# Altium PCB PAYL0006_PC_Overview_Block.PcbDoc (part 2 of 2)
Units mm, origin at the board's own origin, x right, y up, seen from the top; angles counter-clockwise.
Board outline 116.4 x 100.9 mm, 6 copper layers (Top Layer, MidLayer1, VSUP1_PLANE, GND_PLANE, VSUP3_PLANE, Bottom Layer); 172 components, 183 nets, 811 pads, 237 vias.
Unrouted connection lines stored in the file: 35.
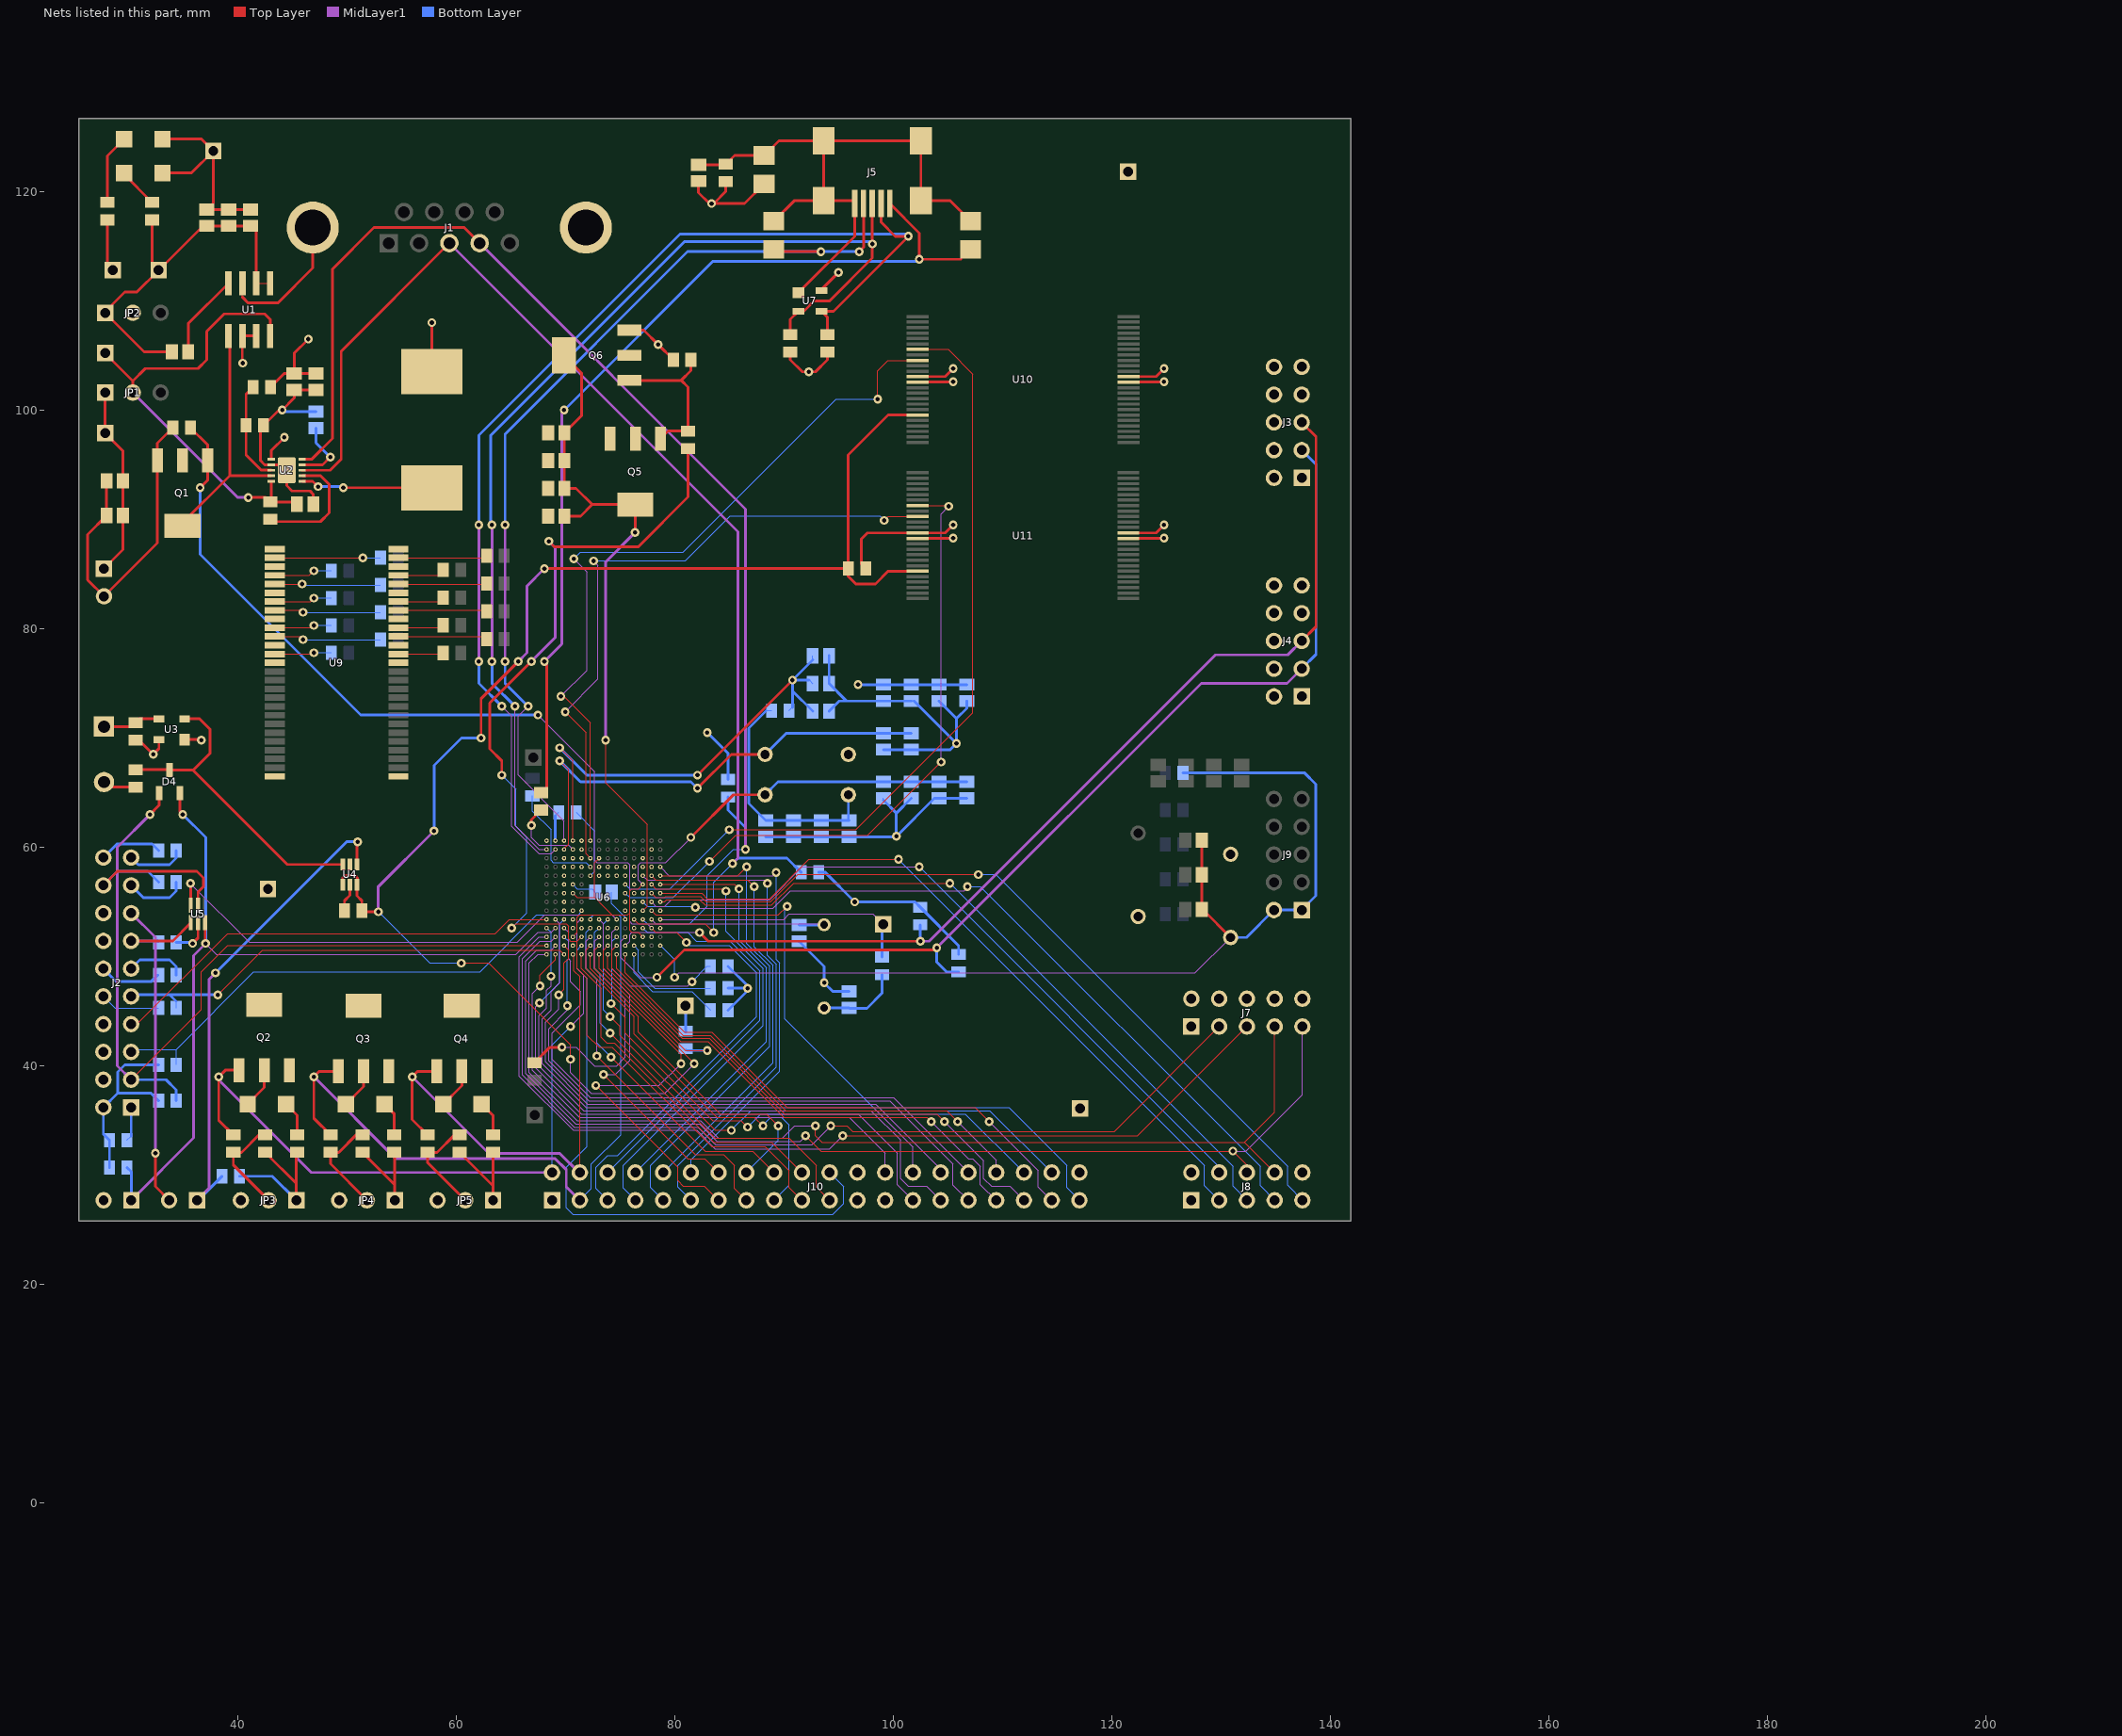
[diagram p6: the nets of this part, all layers, seen from the top]

## Via types
v1: diameter 0.8, hole 0.4, Top Layer to Bottom Layer, 235 vias
v2: diameter 1.5, hole 1, Top Layer to Bottom Layer, 2 vias

## Nets (pads, with @x,y where several pads share a name; then routed paths per layer and width w, separated by ;. In a path a pad name is that pad's centre, name@x,y a point inside that pad or via, vN(x,y) a via of type N, cw(c..) or ccw(c..) an arc to the next point about the centre after c; other vN are vias at no path point) (continued)
GND: C1.2 C2.1 C3.2 C4.1 C5.2 C6.2 C7.2 C8.2 C9.2 C10.2 C11.1 C12.1 C27.1 C29.2 C30.2 C31.2 C32.2 C33.2 C34.2 C35.2 C36.2 C37.2 C38.2 C39.2 C40.2 C41.2 C42.2 C43.2 C44.2 C45.2 C46.2 C47.2 C48.2 C49.2 D2.2 D3.2 D11.1 FB5.1 J1.10 J1.11 J2.4 J2.6 J2.8 J2.10 J2.12 J2.14 J2.16 J2.18 J2.20 J3.4 J3.6 J3.7 J3.8 J3.9 J3.10 J4.4 J4.6 J4.7 J4.8 J4.9 J4.10 J7.4 J7.6 J7.8 J7.10 J8.10 J10.23 J10.24 J10.25 J10.40 JP3.3 JP4.3 JP5.3 JP6.2 PJ1.2 Q1.3 Q2.3 Q3.3 Q4.3 R2.1 R4.1 R12.1 R13.1 R14.1 R15.1 R18.1 R34.1 R35.1 R36.1 R37.1 R111.1 R112.1 R113.1 S1.2 TP1.1 TP2.1 TP3.1 TP4.1 U1.3 U1.6 U1.7 U2.2 U2.11 U3.1 U4.2 U5.2 U6.A11 U6.B4 U6.B12 U6.C3 U6.C4 U6.C7 U6.D4 U6.D6 U6.D8 U6.D9 U6.D12 U6.E4 U6.E9 U6.F4 U6.G4 U6.G11 U6.H4 U6.K3 U6.K4 U6.L3 U6.L6 U6.L9 U6.L11 U6.L13 U6.M3 U6.M4 U6.M6 U6.M8 U6.N1 U9.6 U9.12 U9.28 U9.41 U9.46 U9.52 U9.54 U10.13 U10.36 U11.13 U11.36 | length 235
  Top Layer w0.1: v1@36.65,69.85 v1(36.7,69.8) ; v1@40.454,104.346 v1(40.5,104.3) ; 40.454,110.346 U1.3@40.454,111.587 ; v1@43.797,100 v1(44.1,100) ; U2.11@44.018,94.993 U2.11@44.518,94.493 ; v1@83.2,118.9 v1(83.4,118.9) ; v1@105.466,88.266 v1(105.5,88.3) ; v1@105.466,102.566 v1(105.5,102.6) ; v1@124.766,88.266 v1(124.8,88.3) ; v1@124.766,102.566 v1(124.8,102.6)
  Top Layer w0.25: J2.18@27.74,56.516 29.024,57.8 36.3,57.8 36.9,57.2 36.9,56.4 36.4,55.9 U5.2@36.4,54.7 ; S1.2@27.8,65.96 28.26,65.5 R18.1@30.7,65.5 ; C2.1@28.036,93.529 C1.2@28.036,90.354 26.3,88.618 26.3,84.46 PJ1.2@27.8,82.96 32.682,87.842 Q1.3@32.682,95.406 32.682,96.982 R2.1@34.1,98.4 ; D2.2@33.15,121.7 35.8,121.7 TP4.1@37.8,123.7 ; D3.2@33.15,124.8 36.7,124.8 TP4.1@37.8,123.7 ; U3.1@35.175,69.85 v1@36.65,69.85 ; v1@40.454,104.346 U1.6@40.454,106.787 U1.7@41.724,106.787 ; 40.454,110.346 41,109.8 43.7,109.8 46.905,113.005 J1.10@46.905,116.7 ; C9.2@41.2,118.35 C8.2@39.2,118.35 C7.2@37.2,118.35 37.8,118.95 TP4.1@37.8,123.7 ; U2.2@43.1,95 42.5,95 42.1,95.4 42.1,98.303 v1@43.797,100 ; U2.2@43.106,94.993 U2.11@44.018,94.993 ; v1(44.1,100) 45.2,101.1 C5.2@45.2,101.85 C6.2@47.2,101.85 ; U2.11@44.518,94.493 44.518,93.082 45,92.6 46.65,92.6 46.95,92.3 C4.1@46.95,91.4 ; C12.1@82.2,120.95 82.2,119.9 v1@83.2,118.9 ; v1(83.4,118.9) v1@83.6,118.9 ; R37.1@84.7,120.9 84.7,120 v1@83.6,118.9 ; D11.1@88.2,120.7 86.4,118.9 v1@83.6,118.9 ; R35.1@90.6,105.3 90.6,104.6 91.7,103.5 v1(92.3,103.5) 92.9,103.5 94,104.6 R34.1@94,105.3 ; U11.13@102.244,88.266 v1@105.466,88.266 ; U10.13@102.244,102.566 v1@105.466,102.566 ; U11.36@121.544,88.266 v1@124.766,88.266 ; U10.36@121.544,102.566 v1@124.766,102.566
  Bottom Layer w0.1: J2.10@27.74,46.356 28.796,45.3 R12.1@32.8,45.3 ; R13.1@32.7,48.3 R13.1@32.8,48.3 ; v1(44.1,100) v1@44.25,99.85 ; R36.1@69.1,62.9 R36.1@69.4,63.2 ; U6.L6@70.7,56.6 71.1,56.2 72.45,56.2 C27.1@72.75,55.9 ; v1@86.7,46.9 v1(86.7,47.1) v1@86.7,47.3 ; C11.1@91.414,51.386 C11.1@91.414,51.398 ; 95.7,73.378 95.7,73.43 ; C10.2@95.986,46.802 C10.2@95.986,46.814 ; C40.2@99.121,64.306 C40.2@99.121,64.488 ; v1@100.253,60.953 v1(100.3,61) ; C35.2@101.661,73.378 C35.2@101.922,73.378
  Bottom Layer w0.25: J2.12@27.74,48.896 28.936,47.7 32.1,47.7 R13.1@32.7,48.3 ; J2.18@27.74,56.516 29.024,57.8 31.8,57.8 R14.1@32.8,56.8 ; J2.20@27.74,59.056 28.984,60.3 32.2,60.3 R15.1@32.8,59.7 ; v1@44.25,99.85 C3.2@47.2,99.85 ; U6.N1@69.1,60.6 R36.1@69.1,62.9 ; R111.1@84.9,45.1 v1@86.7,46.9 ; R112.1@84.9,47.1 v1(86.7,47.1) ; R113.1@84.9,49.1 v1@86.7,47.3 ; C32.2@88.348,60.953 C31.2@90.888,60.953 C30.2@93.428,60.953 C29.2@95.968,60.953 v1@100.253,60.953 ; C11.1@91.414,51.386 93.7,49.1 v1(93.7,47.6) 94.486,46.814 C10.2@95.986,46.814 ; C47.2@94.147,72.443 95.082,73.378 95.7,73.378 C36.2@99.121,73.378 C35.2@101.661,73.378 ; C45.2@94.147,77.523 C46.2@94.147,74.983 95.7,73.43 ; C40.2@99.121,64.306 100.3,63.127 ; C48.2@99.121,68.933 C49.2@101.661,68.933 105.233,68.933 v1(105.8,69.5) ; C39.2@101.661,64.488 100.3,63.127 ; C35.2@101.922,73.378 v1(105.8,69.5) ; C34.2@104.201,73.378 105.8,71.779 ; C37.2@106.741,64.488 C38.2@104.201,64.488 103.788,64.488 v1(100.3,61) 100.3,63.127 ; C33.2@106.741,73.378 106.741,72.72 105.8,71.779 ; v1(105.8,69.5) 105.8,71.779
GPIO0: J10.2 Q2.1 R20.1 U6.K10 | length 67.1
  Top Layer w0.25: R20.1@39.634,33.682 38.3,35.016 v1(38.3,39) 38.901,39.601 Q2.1@40.163,39.601
  MidLayer1 w0.1: v1(70.5,43.6) 71.7,44.8 71.7,48.3 71.1,48.9 71.1,53.1 71.4,53.4 U6.K10@71.5,53.4
  MidLayer1 w0.25: v1(38.3,39) 38.3,38.7 46.76,30.24 J10.2@68.8,30.24
  Bottom Layer w0.1: J10.2@68.8,30.24 68.8,41.9 v1(70.5,43.6)
GPIO1: J10.3 Q3.1 R21.1 U6.J10 | length 68.9
  Top Layer w0.25: R21.1@48.524,33.682 47,35.206 v1(47,39) 47.501,39.501 Q3.1@49.253,39.501
  MidLayer1 w0.25: v1(47,39) 54.5,31.5 69.1,31.5 70.1,30.5 70.1,28.94 J10.3@71.34,27.7
  Bottom Layer w0.1: J10.3@71.34,27.7 72.4,28.76 72.4,31 75.1,33.7 75.1,53.6 74.9,53.8 72.6,53.8 72.3,53.5 U6.J10@72.3,53.4
GPIO2: J10.4 Q4.1 R22.1 U6.L14 | length 47.5
  Top Layer w0.1: U6.L14@70.7,50.2 70.8,50.1 70.8,48.7 71.34,48.16 J10.4@71.34,30.24
  Top Layer w0.25: R22.1@57.414,33.682 56,35.096 v1(56,39) 56.501,39.501 Q4.1@58.243,39.501
  MidLayer1 w0.1: J10.4@71.26,30.24 J10.4@71.34,30.24
  MidLayer1 w0.25: v1(56,39) 63,32 69.5,32 J10.4@71.26,30.24
GPIO3: J10.5 Q1.1 R2.2 U6.B11 | length 115
  Top Layer w0.1: U6.B11@77.9,52.6 78.3,52.2 80.2,52.2 v1(81.1,51.3)
  Top Layer w0.25: R2.2@35.7,98.4 37.282,96.818 Q1.1@37.282,95.406 37.282,93.582 v1(36.6,92.9)
  MidLayer1 w0.1: v1(67.5,72.1) 72.7,66.9 72.7,58.8 72.9,58.6 75.7,58.6 75.9,58.4 75.9,53.2 76.1,53 77.5,53 U6.B11@77.9,52.6
  Bottom Layer w0.1: J10.5@73.88,27.7 72.8,28.78 72.8,30.7 73.9,31.8 74.8,31.8 87.5,44.5 87.5,48.5 85,51 81.4,51 v1(81.1,51.3)
  Bottom Layer w0.25: v1(36.6,92.9) 36.6,86.8 51.3,72.1 v1(67.5,72.1)
GPIO4: J10.6 U6.C11 | length 36.5
  Bottom Layer w0.1: J10.6@73.88,30.24 87.8,44.16 87.8,48.7 85.1,51.4 82,51.4 81.2,52.2 77.5,52.2 U6.C11@77.1,52.6
GPIO5: J10.7 U6.B6 | length 42.5
  Top Layer w0.1: U6.B6@77.9,56.6 78.3,56.2 84.5,56.2 v1(84.7,56)
  Bottom Layer w0.1: J10.7@76.42,27.7 75.3,28.82 75.3,30.9 88.1,43.7 88.1,48.9 84.7,52.3 v1(84.7,56)
GPIO6: J10.8 U6.A6 | length 39.3
  Top Layer w0.1: U6.A6@78.7,56.6 85.5,56.6 v1(85.9,56.2)
  Bottom Layer w0.1: J10.8@76.42,30.24 88.4,42.22 88.4,49 85.9,51.5 v1(85.9,56.2)
GPIO7: J10.9 U6.A5 | length 44.6
  Top Layer w0.1: U6.A5@78.7,57.4 85.8,57.4 v1(86.6,58.2)
  Bottom Layer w0.1: J10.9@78.96,27.7 77.8,28.86 77.8,30.9 88.7,41.8 88.7,49.1 86.6,51.2 v1(86.6,58.2)
GPIO8: J10.10 U6.B5 | length 40.8
  Top Layer w0.1: U6.B5@77.9,57.4 78.3,57 86.7,57 v1(87.3,56.4)
  Bottom Layer w0.1: J10.10@78.96,30.24 89,40.28 89,49.2 87.3,50.9 v1(87.3,56.4)
GPIO9: J10.11 U6.C5 | length 45.2
  MidLayer1 w0.1: U6.C5@77.1,57.4 77.5,57 88.2,57 v1(88.5,56.7)
  Bottom Layer w0.1: J10.11@81.5,27.7 80.3,28.9 80.3,30.9 89.3,39.9 89.3,49.3 88.5,50.1 v1(88.5,56.7)
GPIO10: J10.12 U6.A4 | length 42
  MidLayer1 w0.1: U6.A4@78.7,58.2 79.5,57.4 89,57.4 v1(89.3,57.7)
  Bottom Layer w0.1: J10.12@81.5,30.24 81.5,31.4 89.6,39.5 89.6,49.4 89.3,49.7 v1(89.3,57.7)
GPIO11: J10.13 U6.H13 | length 39.2
  Top Layer w0.1: v1(72.8,38.2) 80.3,30.7 80.3,29.5 80.8,29 82.74,29 J10.13@84.04,27.7 ; U6.H13@73.1,51 72.7,50.6 72.7,48.9 80.6,41 v1(80.6,40.2)
  MidLayer1 w0.1: v1(72.8,38.2) 78.6,38.2 v1(80.6,40.2)
GPIO12: J10.14 U6.H10 | length 31.5
  Top Layer w0.1: v1@73.5,38.9 v1(73.5,39.2) 81.2,31.5 82.78,31.5 J10.14@84.04,30.24
  MidLayer1 w0.1: U6.H10@73.1,53.4 73.5,53 73.5,48.9 75.9,46.5 75.9,40.5 74.6,39.2 v1(73.5,39.2)
GPIO13: J10.15 U6.J12 | length 31.9
  Top Layer w0.1: v1(72.9,40.9) 81.9,31.9 84.5,31.9 85.5,30.9 85.5,28.78 J10.15@86.58,27.7
  MidLayer1 w0.1: U6.J12@72.3,51.8 71.9,51.4 71.9,48.9 72.9,47.9 v1(72.9,40.9)
GPIO14: J10.16 U6.J14 | length 30.8
  Top Layer w0.1: U6.J14@72.3,50.2 72.3,48.9 76.7,44.5 76.7,43.1 84.2,35.6 88.4,35.6 v1(89.5,34.5)
  Bottom Layer w0.1: J10.16@86.58,30.24 89.5,33.16 v1(89.5,34.5)
GPIO15: J10.17 U6.J13 | length 35.9
  Top Layer w0.1: U6.J13@72.3,51 71.9,50.6 71.9,48.9 76.3,44.5 76.3,42.9 83.9,35.3 87.3,35.3 v1(88.1,34.5)
  Bottom Layer w0.1: v1(88.1,34.5) 88.1,34.6 88.8,35.3 89.8,35.3 90.5,34.6 90.5,29.08 J10.17@89.12,27.7
GPIO16: J10.18 U6.J11 | length 32.2
  Top Layer w0.1: v1(74.2,40.8) 82.8,32.2 87.16,32.2 J10.18@89.12,30.24
  Bottom Layer w0.1: U6.J11@72.3,52.6 71.9,52.2 71.9,48.9 72.9,47.9 72.9,42.1 v1(74.2,40.8)
GPIO17_VPP_SEL: J10.19 R31.2 U6.K12 | length 103.3
  Top Layer w0.1: v1(65.1,52.6) 65.5,53 70.1,53 70.3,52.8 70.3,51.6 70.5,51.4 71.1,51.4 ; U6.K12@71.5,51.8 71.1,51.4 ; J10.19@91.66,27.7 90.5,28.86 90.5,30.4 88.3,32.6 83.4,32.6 74.3,41.7 73.1,41.7 72,42.8 72,48 71.1,48.9 71.1,51.4
  Top Layer w0.25: v1(64.2,66.6) 64.2,67.9 63.1,69 63.1,73.2 v1(66.9,77) ; v1(68.5,88) 69,87.5 76.7,87.5 81.247,92.047 R31.2@81.247,96.488
  MidLayer1 w0.25: v1(66.9,77) 69.1,79.2 69.1,87.4 v1(68.5,88)
  Bottom Layer w0.1: v1(64.2,66.6) 65.5,65.3 65.5,61.9 66.5,60.9 66.5,54 v1(65.1,52.6)
GPIO18: J10.20 U6.K14 | length 31.8
  Top Layer w0.1: U6.K14@71.5,50.2 71.5,48.9 73.3,47.1 73.3,42.6 73.8,42.1 74.5,42.1 83.6,33 88.9,33 J10.20@91.66,30.24
GPIO19: J10.21 U6.H11 | length 38
  Top Layer w0.1: v1(74.1,43) 77.3,39.8 83.7,33.4 90.5,33.4 93,30.9 93,28.9 J10.21@94.2,27.7
  Bottom Layer w0.1: U6.H11@73.1,52.6 72.7,52.2 72.7,48.9 73.2,48.4 73.2,43.9 v1(74.1,43)
GPIO20: J10.22 U6.K13 | length 54.8
  Bottom Layer w0.1: U6.K13@71.5,51 71.1,50.6 71.1,48.9 72,48 72,32.6 70.1,30.7 70.1,27 70.7,26.4 94.5,26.4 95.5,27.4 95.5,28.94 J10.22@94.2,30.24
I2SRX_BCK0: J10.28 U6.N10 | length 53.4
  MidLayer1 w0.1: U6.N10@69.1,53.4 69.5,53 69.5,47.6 68.7,46.8 68.7,45.1 67.9,44.3 67.9,40.2 71.9,36.2 98.2,36.2 101.82,32.58 J10.28@101.82,30.24
I2SRX_BCK1: J10.34 U6.F14 | length 44.4
  Top Layer w0.1: U6.F14@74.7,50.2 74.7,48.9 80.8,42.8 83.3,42.8 90.2,35.9 104.9,35.9 v1(105.9,34.9)
  MidLayer1 w0.1: v1(105.9,34.9) 109.44,31.36 J10.34@109.44,30.24
I2SRX_DATA0: J10.27 U6.M10 | length 55.9
  MidLayer1 w0.1: v1(67.65,45.75) 67.3,45.4 67.3,39.8 71.5,35.6 96.8,35.6 100.4,32 100.4,29.12 J10.27@101.82,27.7
  Bottom Layer w0.1: v1(67.65,45.75) 69.5,47.6 69.5,53 U6.M10@69.9,53.4
I2SRX_DATA1: J10.33 U6.G14 | length 46.6
  Top Layer w0.1: U6.G14@73.9,50.2 73.9,48.9 80.566,42.234 83.066,42.234 90,35.3 103.1,35.3 v1(103.5,34.9)
  MidLayer1 w0.1: v1(103.5,34.9) 106.9,31.5 107.3,31.5 108,30.8 108,29.14 J10.33@109.44,27.7
I2SRX_WS0: J10.29 U6.P11 | length 57.1
  MidLayer1 w0.1: v1(68.7,48.2) 68.7,47.3 68.3,46.9 68.3,45.3 67.6,44.6 67.6,40 71.7,35.9 98,35.9 100.7,33.2 100.7,29.7 101.4,29 103.06,29 J10.29@104.36,27.7
  Bottom Layer w0.1: U6.P11@68.3,52.6 68.7,52.2 v1(68.7,48.2)
I2SRX_WS1: J10.35 U6.F13 | length 49.7
  Top Layer w0.1: U6.F13@74.7,51 74.3,50.6 74.3,48.9 80.683,42.517 83.183,42.517 90.1,35.6 104,35.6 v1(104.7,34.9)
  MidLayer1 w0.1: v1(104.7,34.9) 108.3,31.3 108.3,29.7 109,29 110.68,29 J10.35@111.98,27.7
I2STX_BCK0: J10.31 U6.M12 | length 57
  MidLayer1 w0.1: v1(70.2,45.5) 70.2,45.1 68.5,43.4 68.5,40.476 72.176,36.8 99.7,36.8 105.5,31 105.5,29.1 J10.31@106.9,27.7
  Bottom Layer w0.1: U6.M12@69.9,51.8 70.3,51.4 70.3,49.8 70.2,49.7 v1(70.2,45.5)
I2STX_BCK1: J10.37 U6.E14 | length 50.2
  Top Layer w0.1: U6.E14@75.5,50.2 75.5,48.5 80.9,43.1 83.424,43.1 90.324,36.2 107.5,36.2 v1(108.8,34.9)
  MidLayer1 w0.1: v1(108.8,34.9) 113.3,30.4 113.3,28.9 114.5,27.7 J10.37@114.52,27.7
I2STX_CLK0: J10.26 U6.N14 | length 48.7
  Top Layer w0.1: v1(67.7,47.3) 67.7,48.3 69.1,49.7 U6.N14@69.1,50.2
  MidLayer1 w0.1: v1(67.7,47.3) 67,46.6 67,39.6 71.3,35.3 96,35.3 99.28,32.02 J10.26@99.28,30.24
I2STX_DATA0: J10.30 U6.M13 | length 52.2
  Top Layer w0.1: v1(69.4,46.5) 69.9,47 69.9,49.4 70.3,49.8 70.3,50.6 U6.M13@69.9,51
  MidLayer1 w0.1: v1(69.4,46.5) 69.4,45.2 68.2,44 68.2,40.351 72.051,36.5 98.4,36.5 104.36,30.54 J10.30@104.36,30.24
I2STX_DATA1: J10.36 U6.F12 | length 52.2
  Top Layer w0.1: v1(74.2,45.7) 75.5,44.4 75.5,43 83.5,35 86.1,35 v1(86.7,34.4)
  Bottom Layer w0.1: v1@74.3,45.8 74.3,51.4 U6.F12@74.7,51.8 ; v1(86.7,34.4) 87.9,35.6 106.62,35.6 J10.36@111.98,30.24
I2STX_WS0: J10.32 U6.M11 | length 56.1
  MidLayer1 w0.1: U6.M11@69.9,52.6 70.3,52.2 70.3,49.8 70.5,49.6 70.5,47.7 71.4,46.8 71.4,45.6 68.8,43 68.8,40.6 72.3,37.1 100.04,37.1 J10.32@106.9,30.24
I2STX_WS1: J10.38 U6.G10 | length 57.6
  Top Layer w0.1: v1(74.1,44.5) 75,43.6 75,42.8 83.7,34.1 v1(85.2,34.1)
  Bottom Layer w0.1: U6.G10@73.9,53.4 73.5,53 73.5,45.1 v1(74.1,44.5) ; v1(85.2,34.1) 87,35.9 108.86,35.9 J10.38@114.52,30.24
JTAG_DBGACK: J2.19 R15.2 | length 5.3
  Bottom Layer w0.25: J2.19@30.28,59.056 30.936,58.4 33.8,58.4 34.4,59 R15.2@34.4,59.7
JTAG_DBGRQ: J2.17 R14.2 | length 5.6
  Bottom Layer w0.25: J2.17@30.28,56.516 31.396,55.4 33.8,55.4 34.4,56 R14.2@34.4,56.8
JTAG_NSRST: J2.15 JP7.2 | length 27.7
  Top Layer w0.25: v1(32.5,32) 32.5,28.96 JP7.2@33.76,27.7
  MidLayer1 w0.25: J2.15@30.28,53.976 32.5,51.756 v1(32.5,32)
JTAG_NTRST: D4.1 J2.3 R8.1 U6.P13 | length 79
  Top Layer w0.1: J2.3@30.28,38.736 36.7,45.156 36.7,48.6 39.1,51 U6.P13@68.3,51
  Top Layer w0.25: v1(32,63) 32.85,63.85 D4.1@32.85,64.95
  MidLayer1 w0.25: J2.3@30.28,38.736 29,40.016 29,60 v1(32,63)
  Bottom Layer w0.25: J2.3@30.28,38.736 33.464,38.736 34.4,37.8 R8.1@34.4,36.8
JTAG_RTCK: J2.11 R13.2 | length 5.5
  Bottom Layer w0.25: J2.11@30.28,48.896 31.084,49.7 33.8,49.7 34.4,49.1 R13.2@34.4,48.3
JTAG_TCK: J2.9 R12.2 U6.M14 | length 43
  Top Layer w0.1: v1(38.2,46.5) 42.3,50.6 69.5,50.6 U6.M14@69.9,50.2
  Bottom Layer w0.1: J2.9@30.28,46.356 J2.9@30.424,46.5 ; R12.2@34.4,45.3 R12.2@34.4,45.9
  Bottom Layer w0.25: J2.9@30.424,46.5 33.8,46.5 ; R12.2@34.4,45.9 33.8,46.5 ; v1(38.2,46.5) 33.8,46.5
JTAG_TDI: J2.5 R9.1 U6.K9 | length 48
  Bottom Layer w0.1: J2.5@30.28,41.276 30.28,41.28 30.5,41.5 34.4,41.5 ; R9.1@34.4,40.1 34.4,41.5 ; U6.K9@71.5,54.2 71.5,54.1 71.2,53.8 67.4,53.8 62.2,48.6 41.5,48.6 34.4,41.5
JTAG_TDO: J2.13 R10.1 U5.4 | length 8.7
  Top Layer w0.25: J2.13@30.28,51.436 34.086,51.436 U5.4@35.75,53.1
  Bottom Layer w0.1: R10.1@32.664,51.436 R10.1@32.8,51.3
  Bottom Layer w0.25: J2.13@30.28,51.436 R10.1@32.664,51.436
JTAG_TMS: J2.7 U6.P10 | length 42
  Top Layer w0.1: J2.7@30.28,43.816 30.816,43.816 39.1,52.1 63.6,52.1 64.9,53.4 U6.P10@68.3,53.4
JTAGSEL: D4.2 JP6.1 R16.1 U5.6 U6.N11 | length 79.5
  Top Layer w0.25: D4.2@34.75,64.95 34.75,63.25 v1(35,63) ; U5.6@37.05,53.1 37.05,51.25 v1(37.1,51.2)
  MidLayer1 w0.1: v1(37.1,51.2) 38.1,50.2 65.5,50.2 67.5,52.2 68.7,52.2 U6.N11@69.1,52.6
  MidLayer1 w0.25: JP6.1@30.3,27.7 36,33.4 36,50.1 v1(37.1,51.2)
  Bottom Layer w0.25: R16.1@29.9,30.7 30.3,30.3 JP6.1@30.3,27.7 ; v1(35,63) 37.1,60.9 v1(37.1,51.2)
NAND_NCS_0: U6.J1 U10.9 | length 69.1
  Top Layer w0.1: v1(69.6,73.8) 69.9,73.8 72.3,71.4 U6.J1@72.3,60.6 ; v1(98.6,101) 98.6,103.6 99.55,104.55 U10.9@102.25,104.55
  MidLayer1 w0.1: v1(69.6,73.8) 72,76.2 72,85.2 v1(70.8,86.4)
  Bottom Layer w0.1: v1(70.8,86.4) 71.4,87 80.8,87 94.8,101 v1(98.6,101)
NAND_NCS_1: U6.J3 U11.9 | length 61.2
  Top Layer w0.1: v1(70,72.4) 71.9,70.5 71.9,59.4 U6.J3@72.3,59 ; v1(99.2,89.9) 99.566,90.266 U11.9@102.244,90.266
  MidLayer1 w0.1: v1(70,72.4) 73,75.4 73,85.8 v1(72.6,86.2)
  Bottom Layer w0.1: v1(72.6,86.2) 81,86.2 85.1,90.3 98.8,90.3 v1(99.2,89.9)
NAND_NCS_2: U6.K1
NAND_NCS_3: U6.K2
NAND_RNB0: U6.E6 U10.7 | length 75.6
  Top Layer w0.1: v1(85,61.6) 96.6,61.6 107.3,72.3 107.3,103.3 105.05,105.55 U10.7@102.25,105.55
  Bottom Layer w0.1: U6.E6@75.5,56.6 75.9,56.2 79.6,56.2 v1(85,61.6)
NAND_RNB1: U6.E7 U11.7 | length 60.8
  Top Layer w0.1: v1(83.2,58.7) 85.6,61.1 97.7,61.1 v1(104.4,67.8) ; U11.7@102.244,91.266 105.034,91.266 v1(105.1,91.2)
  MidLayer1 w0.1: v1(104.4,67.8) 104.4,90.5 v1(105.1,91.2)
  Bottom Layer w0.1: U6.E7@75.5,55.8 75.9,55.4 79.9,55.4 v1(83.2,58.7)
NetC10_1: C10.1 R27.2 Y1.1 | length 7.6
  Bottom Layer w0.1: Y1.1@93.7,45.29 Y1.1@93.712,45.302 ; C10.1@95.986,45.302 C10.1@96.023,45.265
  Bottom Layer w0.25: Y1.1@93.712,45.302 C10.1@95.986,45.302 ; C10.1@96.023,45.265 97.605,45.265 98.978,46.638 R27.2@98.978,48.355
NetC11_2: C11.2 U6.B10 Y1.2 | length 33.7
  MidLayer1 w0.1: U6.B10@77.9,53.4 78.3,53 ; Y1.2@93.7,52.91 Y1.2@93.7,53 ; 78.3,53 Y1.2@93.7,53 ; 78.3,53 Y1.2@93.7,53
  Bottom Layer w0.1: Y1.2@93.688,52.898 Y1.2@93.7,52.91
  Bottom Layer w0.25: C11.2@91.414,52.898 Y1.2@93.688,52.898
NetC24_2: C24.2 C25.2 C26.2 FB4.2 J9.1 J9.2 R44.2 U6.A13 | length 98.1
  Top Layer w0.1: C24.2@128.255,54.305 C24.2@128.335,54.305
  Top Layer w0.25: C24.2@128.255,54.305 C25.2@128.255,57.48 C26.2@128.255,60.655 ; C24.2@128.335,54.305 FB4.2@130.895,51.745
  MidLayer1 w0.1: v1(80,48.1) 80.398,48.498 127.648,48.498 FB4.2@130.895,51.745
  Bottom Layer w0.1: U6.A13@78.7,51 80,49.7 v1(80,48.1)
  Bottom Layer w0.25: R44.2@126.527,66.792 137.668,66.792 138.695,65.765 138.695,55.555 J9.1@137.395,54.255 J9.2@134.855,54.255 132.345,51.745 FB4.2@130.895,51.745
NetC28_1: C28.1 U1.4 | length 7.8
  Top Layer w0.25: C28.1@35.505,105.34 35.505,107.908 U1.4@39.184,111.587
NetD2_1: D2.1 R5.1 | length 3.8
  Top Layer w0.1: D2.1@29.65,121.55 D2.1@29.65,121.7
  Top Layer w0.25: D2.1@29.65,121.55 R5.1@32.2,119
NetD3_1: D3.1 R6.1 | length 6.4
  Top Layer w0.25: R6.1@28.1,119 28.1,123.25 D3.1@29.65,124.8
NetD4_3: D4.3 R18.2 U3.2 U4.3 | length 31.8
  Top Layer w0.1: D4.3@33.75,67.1 D4.3@33.8,67.05 35.95,67.05
  Top Layer w0.25: R18.2@30.7,67.1 D4.3@33.75,67.1 ; D4.3@33.8,67.05 35.95,67.05 ; U3.2@35.175,71.75 36.55,71.75 37.5,70.8 37.5,68.6 35.95,67.05 ; U4.3@49.65,58.425 44.575,58.425 35.95,67.05
NetD6_1: D6.1 R23.1 | length 3.2
  Top Layer w0.25: D6.1@44.45,36.5 45.476,35.474 R23.1@45.476,33.682
NetD6_2: D6.2 Q2.2 Q2.4 | length 3.7
  Top Layer w0.25: D6.2@40.95,36.5 42.463,38.013 Q2.2@42.463,39.601
NetD7_1: D7.1 R24.1 | length 3.2
  Top Layer w0.25: D7.1@53.45,36.5 54.366,35.584 R24.1@54.366,33.682
NetD7_2: D7.2 Q3.2 Q3.4 | length 3.7
  Top Layer w0.25: D7.2@49.95,36.5 51.553,38.103 Q3.2@51.553,39.501
NetD8_1: D8.1 R25.1 | length 3.2
  Top Layer w0.25: D8.1@62.35,36.5 63.383,35.467 R25.1@63.383,33.682
NetD8_2: D8.2 Q4.2 Q4.4 | length 3.7
  Top Layer w0.25: D8.2@58.85,36.5 60.543,38.193 Q4.2@60.543,39.501
NetD9_2: D9.2 J5.4 U6.M1 | length 88.4
  Top Layer w0.1: D9.2@89.1,114.7 D9.2@89.3,114.5
  Top Layer w0.25: D9.2@89.3,114.5 v1(93.4,114.5) ; v1(96.9,114.5) 97.3,114.9 J5.4@97.3,118.9
  MidLayer1 w0.1: v1(66.6,72.9) 65.7,72 65.7,66.6 69.9,62.4 U6.M1@69.9,60.6
  MidLayer1 w0.25: v1(64.5,77) v1(64.5,89.5)
  Bottom Layer w0.25: v1(64.5,77) 64.5,75 v1(66.6,72.9) ; v1(64.5,89.5) 64.5,97.8 81.2,114.5 v1(93.4,114.5) v1(96.9,114.5)
NetJ1_3: J1.3 R50.1 U2.8 U6.D10 | length 117.6
  Top Layer w0.1: U6.D10@76.3,53.4 76.7,53 82.8,53 v1(83.6,52.2)
  Top Layer w0.25: U2.8@45.931,94.493 48.493,94.493 49.5,95.5 49.5,105.38 J1.3@59.4,115.28
  MidLayer1 w0.25: J1.3@59.4,115.28 85.8,88.88 85.8,59 v1(85.3,58.5)
  Bottom Layer w0.1: v1(83.6,52.2) 83.6,56.8 v1(85.3,58.5)
  Bottom Layer w0.25: v1(85.3,58.5) 85.8,59 90.3,59 R50.1@91.6,57.7
NetJ1_4: J1.4 R49.1 U2.10 U6.C10 | length 119.7
  Top Layer w0.25: U2.10@45.931,95.493 46.793,95.493 48.7,97.4 48.7,112.9 52.5,116.7 60.75,116.7 J1.4@62.17,115.28
  MidLayer1 w0.25: J1.4@62.17,115.28 86.5,90.95 v1(86.5,59.8)
  Bottom Layer w0.1: U6.C10@77.1,53.4 77.5,53 81.4,53 83,54.6 83,57.4 85.4,59.8 v1(86.5,59.8)
  Bottom Layer w0.25: R49.1@84.9,64.6 84.9,63.4 86.5,61.8 v1(86.5,59.8)
NetJ2_1: J2.1 R7.1 | length 3.2
  Bottom Layer w0.1: R7.1@29.9,33.2 R7.1@30.28,33.58
  Bottom Layer w0.25: R7.1@30.28,33.58 J2.1@30.28,36.196
NetJ3_3: J3.3 J4.3 R51.1 U6.E12 | length 101.6
  Top Layer w0.25: v1(78.4,48.1) 80.9,50.6 103.8,50.6 v1(104,50.8)
  MidLayer1 w0.1: U6.E12@75.5,51.8 75.1,51.4 75.1,49.9 76.9,48.1 v1(78.4,48.1)
  MidLayer1 w0.25: v1(104,50.8) 128.2,75 136.06,75 J4.3@137.4,76.34
  Bottom Layer w0.25: v1(104,50.8) 104,49.5 104.9,48.6 R51.1@106,48.6 ; J4.3@137.4,76.34 138.7,77.64 138.7,95.04 J3.3@137.4,96.34
NetJ3_5: J3.5 J4.5 R52.1 U6.E13 | length 97.2
  Top Layer w0.25: v1(82.3,52.2) 83.1,51.4 v1(102.5,51.4) ; J4.5@137.4,78.88 138.7,80.18 138.7,97.58 J3.5@137.4,98.88
  MidLayer1 w0.1: U6.E13@75.5,51 75.9,51.4 75.9,52 76.1,52.2 v1(82.3,52.2) ; v1(102.5,51.4) v1@102.6,51.5
  MidLayer1 w0.25: v1(102.5,51.4) 103.3,51.4 129.5,77.6 136.12,77.6 J4.5@137.4,78.88
  Bottom Layer w0.25: v1(102.5,51.4) R52.1@102.5,52.9
NetJ5_2: J5.2 R34.2 U6.N2 U7.3 | length 107.3
  Top Layer w0.25: R34.2@94,106.9 94,108.5 U7.3@93.45,109.05 94.55,109.05 v1(101.4,115.9) 100.2,115.9 98.9,117.2 J5.2@98.9,118.9
  MidLayer1 w0.1: v1(64.2,72.9) 65.1,72 65.1,61.9 67.6,59.4 68.7,59.4 U6.N2@69.1,59.8
  MidLayer1 w0.25: v1(62.1,77) v1(62.1,89.5)
  Bottom Layer w0.25: v1(62.1,77) 62.1,75 v1(64.2,72.9) ; v1(62.1,89.5) 62.1,97.7 80.5,116.1 101.3,116.1 v1@101.5,115.9
NetJ5_3: J5.3 R35.2 U6.P2 U7.2 | length 99
  Top Layer w0.25: R35.2@90.6,106.9 90.6,108.3 U7.2@91.35,109.05 91.85,109.05 92.8,110 94.2,110 98.1,113.9 v1(98.1,115.2) J5.3@98.1,118.9
  MidLayer1 w0.1: v1(65.4,72.9) 65.4,62 67.6,59.8 U6.P2@68.3,59.8
  MidLayer1 w0.25: v1(63.3,77) v1(63.3,89.5)
  Bottom Layer w0.25: v1@63.2,89.3 63.2,97.7 80.9,115.4 v1@98.1,115.4 ; v1(63.3,77) 63.3,75 v1(65.4,72.9)
NetJ7_3: J7.3 U6.N12 | length 85.7
  Top Layer w0.1: v1(94.3,34.5) 95.8,34.5 96.3,34 120.24,34 J7.3@129.84,43.6
  MidLayer1 w0.1: U6.N12@69.1,51.8 68.7,51.4 67.7,51.4 66.1,49.8 66.1,39.151 70.851,34.4 82.151,34.4 83.751,32.8 92.6,32.8 v1(94.3,34.5)
NetJ7_5: J7.5 U6.P12 | length 88.2
  Top Layer w0.1: v1(95.4,33.6) 122.38,33.6 J7.5@132.38,43.6
  MidLayer1 w0.1: U6.P12@68.3,51.8 67.6,51.8 65.8,50 65.8,39.027 70.727,34.1 82.027,34.1 83.727,32.4 94.2,32.4 v1(95.4,33.6)
NetJ7_7: J7.7 J8.8 U6.P14 | length 97.1
  Top Layer w0.1: v1(92.9,34.5) 92.9,33.6 93.5,33 132.16,33 ; J8.8@134.92,30.24 132.16,33 ; J7.7@134.92,43.6 134.92,35.76 132.16,33
  MidLayer1 w0.1: U6.P14@68.3,50.2 67.5,50.2 66.7,49.4 66.7,39.4 71.1,35 82.4,35 84,33.4 89.9,33.4 91,34.5 v1(92.9,34.5)
NetJ7_9: J7.9 J8.6 U6.N13 | length 98.9
  Top Layer w0.1: v1(92,33.6) 93.4,32.2 v1(131.1,32.2) 132.38,30.92 J8.6@132.38,30.24
  MidLayer1 w0.1: U6.N13@69.1,51 68.7,50.6 67.4,50.6 66.4,49.6 66.4,39.276 70.976,34.7 82.276,34.7 83.876,33.1 91.5,33.1 v1(92,33.6) ; v1(131.1,32.2) 132.3,32.2 137.46,37.36 J7.9@137.46,43.6
NetJ8_3: J8.3 U6.A7 | length 66.9
  Top Layer w0.1: U6.A7@78.7,55.8 82.5,55.8 83,55.3 88.7,55.3 92.3,58.9 v1(100.5,58.9)
  Bottom Layer w0.1: v1(100.5,58.9) 128.5,30.9 128.5,29.04 J8.3@129.84,27.7
NetJ8_4: J8.4 U6.B8 | length 65.5
  MidLayer1 w0.1: U6.B8@77.9,55 78.3,54.6 79.1,54.6 79.7,55.2 88.7,55.2 91.7,58.2 v1(102.4,58.2)
  Bottom Layer w0.1: v1(102.4,58.2) 129.84,30.76 J8.4@129.84,30.24
NetJ8_5: J8.5 U6.A8 | length 67.9
  Top Layer w0.1: U6.A8@78.7,55 79.1,55 79.3,55.2 82.3,55.2 82.8,54.7 88.9,54.7 90.9,56.7 v1(105.2,56.7)
  Bottom Layer w0.1: v1(105.2,56.7) 131.1,30.8 131.1,28.98 J8.5@132.38,27.7
NetJ8_7: J8.7 U6.C8 | length 71.9
  MidLayer1 w0.1: v1@81.9,54.4 89,54.4 90.6,56 100.5,56 106.5,56 106.8,56.3 v1(106.8,56.4)
  Bottom Layer w0.1: U6.C8@77.1,55 77.5,54.6 81.7,54.6 v1@81.9,54.4 ; v1(106.8,56.4) 108,56.4 133.6,30.8 133.6,29.02 J8.7@134.92,27.7
  other v1: 81.9,54.5
NetJ8_9: J8.9 U6.B7 | length 74.4
  Top Layer w0.1: U6.B7@77.9,55.8 78.3,55.4 79.1,55.4 79.2,55.5 82.4,55.5 82.9,55 88.8,55 91.3,57.5 v1(107.8,57.5)
  Bottom Layer w0.1: v1(107.8,57.5) 109.4,57.5 136.1,30.8 136.1,29.06 J8.9@137.46,27.7
NetJP3_2: JP3.2 R20.2 R116.1 | length 9.3
  Top Layer w0.25: R116.1@42.555,33.682 41.982,33.682 40.382,32.082 R20.2@39.634,32.082 39.634,30.926 JP3.2@42.86,27.7
NetJP4_2: JP4.2 R21.2 R115.1 | length 9.3
  Top Layer w0.25: R115.1@51.445,33.682 50.882,33.682 49.282,32.082 R21.2@48.524,32.082 48.524,31.036 JP4.2@51.86,27.7
NetJP5_2: JP5.2 R22.2 R114.1 | length 9.4
  Top Layer w0.1: R114.1@59.882,33.682 R114.1@60.335,33.682
  Top Layer w0.25: R114.1@59.882,33.682 58.282,32.082 R22.2@57.414,32.082 57.414,31.146 JP5.2@60.86,27.7
NetJP7_1: JP7.1 R11.1 U4.1 | length 44.8
  Top Layer w0.1: v1@50.95,60.45 v1(51,60.5)
  Top Layer w0.25: U4.1@50.95,58.425 v1@50.95,60.45
  MidLayer1 w0.25: JP7.1@36.3,27.7 37.4,28.8 37.4,47.9 v1(38,48.5)
  Bottom Layer w0.1: JP7.1@36.3,27.7 JP7.1@36.4,27.7
  Bottom Layer w0.25: JP7.1@36.4,27.7 R11.1@38.6,29.9 ; v1(38,48.5) 50,60.5 v1(51,60.5)
NetL1_1: L1.1 U2.6 | length 12.1
  Top Layer w0.1: L1.1@57.775,92.9 L1.1@57.8,92.875
  Top Layer w0.25: U2.6@45.931,93.493 46.907,93.493 v1(47.4,93) ; v1(49.7,92.9) L1.1@57.775,92.9
  Bottom Layer w0.1: v1@49.6,93 v1(49.7,92.9)
  Bottom Layer w0.25: v1(47.4,93) v1@49.6,93
NetQ5_1: Q5.1 Q6.1 R31.1 R32.2 | length 14.7
  Top Layer w0.25: Q6.1@75.867,102.719 80.619,102.719 ; Q5.1@78.721,97.367 79.442,98.088 R31.1@81.247,98.088 81.247,102.091 80.619,102.719 ; R32.2@81.5,104.6 81.5,103.6 80.619,102.719
NetR1_1: R1.1 U2.7 | length 11.2
  Top Layer w0.1: R1.1@43,90 R1.1@43.2,89.8
  Top Layer w0.25: R1.1@43.2,89.8 47.6,89.8 48.4,90.6 48.4,93.2 47.607,93.993 U2.7@45.931,93.993
NetR3_1: R3.1 R4.2 U2.3 | length 9.3
  Top Layer w0.25: R3.1@41.432,102.094 40.797,101.459 40.797,98.6 40.797,95.903 42.2,94.5 U2.3@43.106,94.5
NetR17_1: R17.1 S1.1 U3.3 | length 5.3
  Top Layer w0.1: R17.1@30.34,71.04 R17.1@30.7,71.4 R17.1@31.05,71.75
  Top Layer w0.25: S1.1@27.8,71.04 R17.1@30.34,71.04 ; R17.1@31.05,71.75 U3.3@32.825,71.75
NetR27_1: R27.1 TP9.1 U6.A10 | length 23.9
  MidLayer1 w0.1: U6.A10@78.7,53.4 90,53.4 90.5,53.9 98.17,53.9 TP9.1@99.105,52.965
  Bottom Layer w0.25: R27.1@98.978,49.955 TP9.1@98.978,52.838
NetR28_2: R28.2 U6.H12 | length 22.2
  Top Layer w0.25: R28.2@67.2,40.3 68.6,41.7 v1(69.7,41.7)
  MidLayer1 w0.1: v1(69.7,41.7) 71,41.7 72.7,40 74.7,40 75.5,40.8 75.5,46.1 72.7,48.9 72.7,51.4 U6.H12@73.1,51.8
NetR29_2: R29.2 U6.J4 | length 10.5
  Bottom Layer w0.1: R29.2@67,64.7 67,63.3 68.7,61.6 68.7,58.8 68.9,58.6 71.9,58.6 U6.J4@72.3,58.2
NetR30_2: R30.2 U6.G13 | length 16.9
  Top Layer w0.1: U6.G13@73.9,51 73.5,50.6 73.5,48.9 81,41.4 v1(83,41.4)
  Bottom Layer w0.1: R30.2@81.018,41.562 R30.2@81.18,41.4
  Bottom Layer w0.25: R30.2@81.18,41.4 v1(83,41.4)
NetR33_1: R33.1 U6.L2 | length 7.1
  Top Layer w0.25: v1(66.9,62) 66.9,62.5 R33.1@67.8,63.4
  MidLayer1 w0.1: v1(66.9,62) 66.9,60.9 67.6,60.2 70.3,60.2 U6.L2@70.7,59.8
NetR36_2: R36.2 U6.J5 | length 6.7
  Bottom Layer w0.1: R36.2@71,63.2 72.7,61.5 72.7,57.8 U6.J5@72.3,57.4
NetR95_1: R95.1 U9.2 | length 9.7
  Top Layer w0.1: U9.2@43.438,86.485 v1(51.485,86.485)
  Bottom Layer w0.1: v1(51.485,86.485) 51.5,86.5 R95.1@53.1,86.5
NetR96_1: R96.1 U9.4 | length 5.3
  Top Layer w0.1: U9.4@43.438,84.885 46.585,84.885 v1(47,85.3)
  Bottom Layer w0.1: v1(47,85.3) R96.1@48.6,85.3
NetR97_1: R97.1 U9.5 | length 9.7
  Top Layer w0.1: U9.5@43.438,84.085 v1(45.915,84.085)
  Bottom Layer w0.1: v1(45.915,84.085) 46,84 R97.1@53.1,84
NetR98_1: R98.1 U9.7 | length 5.3
  Top Layer w0.1: U9.7@43.438,82.485 46.685,82.485 v1(47,82.8)
  Bottom Layer w0.1: v1(47,82.8) R98.1@48.6,82.8
NetR99_1: R99.1 U9.8 | length 9.7
  Top Layer w0.1: U9.8@43.438,81.685 45.815,81.685 v1(46,81.5)
  Bottom Layer w0.1: v1(46,81.5) R99.1@53.1,81.5
NetR100_1: R100.1 U9.10 | length 5.3
  Top Layer w0.1: U9.10@43.438,80.085 46.785,80.085 v1(47,80.3)
  Bottom Layer w0.1: v1(47,80.3) R100.1@48.6,80.3
NetR101_1: R101.1 U9.11 | length 9.8
  Top Layer w0.1: U9.11@43.438,79.285 45.715,79.285 v1(46,79)
  Bottom Layer w0.1: v1(46,79) R101.1@53.1,79
NetR102_1: R102.1 U9.13 | length 5.3
  Top Layer w0.1: U9.13@43.438,77.685 46.902,77.701 v1(47,77.8)
  Bottom Layer w0.1: v1@46.902,77.701 v1(47,77.8) R102.1@48.6,77.8
NetR103_1: R103.1 U9.42 | length 4.1
  Top Layer w0.1: U9.42@54.738,77.685 58.745,77.685 R103.1@58.834,77.774
NetR104_1: R104.1 U9.44 | length 8.2
  Top Layer w0.1: U9.44@54.738,79.285 62.568,79.285 R104.1@62.809,79.044
NetR105_1: R105.1 U9.45 | length 4.2
  Top Layer w0.1: U9.45@54.738,80.085 58.605,80.085 R105.1@58.834,80.314
NetR106_1: R106.1 U9.47 | length 8.1
  Top Layer w0.1: U9.47@54.738,81.685 R106.1@62.809,81.685
NetR107_1: R107.1 U9.48 | length 4.2
  Top Layer w0.1: U9.48@54.738,82.485 58.465,82.485 R107.1@58.834,82.854
NetR108_1: R108.1 U9.50 | length 8.1
  Top Layer w0.1: U9.50@54.738,84.085 R108.1@62.809,84.085
NetR109_1: R109.1 U9.51 | length 4.3
  Top Layer w0.1: U9.51@54.738,84.885 58.325,84.885 R109.1@58.834,85.394
NetR110_1: R110.1 U9.53 | length 8.1
  Top Layer w0.1: U9.53@54.738,86.485 R110.1@62.809,86.485
NetR111_2: R111.2 U6.D14 | length 10.1
  Bottom Layer w0.1: U6.D14@76.3,50.2 76.3,48.5 78,46.8 81.6,46.8 R111.2@83.3,45.1
NetR112_2: R112.2 U6.D13 | length 9.8
  Bottom Layer w0.1: U6.D13@76.3,51 76.7,50.6 76.7,48.6 78.2,47.1 R112.2@83.3,47.1
NetR113_2: R113.2 U6.F11 | length 14.3
  MidLayer1 w0.1: U6.F11@74.7,52.6 74.3,52.2 74.3,48.9 75.9,47.3 81.2,47.3 v1(81.6,47.7)
  Bottom Layer w0.1: v1(81.6,47.7) 83,49.1 R113.2@83.3,49.1
NRESET_LPC: R19.1 R43.1 U4.4 U4.6 U6.H14 U10.19 U11.19 | length 151.7
  Top Layer w0.1: U4.6@50.95,56.575 U4.6@51,56.625 ; R19.1@51.4,54.2 R19.1@51.5,54.1 ; v1(60.5,49.4) 63,49.4 70.5,41.9 v1(70.5,40.6) ; U6.H14@73.1,50.2 73.1,48.9 v1(81.8,40.2)
  Top Layer w0.25: U4.4@49.65,56.575 49.65,57.25 49.8,57.4 50.8,57.4 51,57.2 U4.6@51,56.625 ; U4.6@50.95,56.575 50.95,55.55 51.4,55.1 R19.1@51.4,54.2 51.5,54.1 v1(52.9,54.1) ; v1(62.3,70) 62.3,73.6 v1(65.7,77) ; v1(68.1,85.5) R43.1@95.9,85.5 ; U11.19@102.244,85.266 99.566,85.266 98.4,84.1 96.6,84.1 95.9,84.8 R43.1@95.9,85.5 ; U10.19@102.25,99.55 99.55,99.55 95.9,95.9 R43.1@95.9,85.5
  MidLayer1 w0.1: v1(70.5,40.6) 70.5,39.4 72.4,37.5 79.1,37.5 v1(81.8,40.2)
  MidLayer1 w0.25: v1(52.9,54.1) 52.9,56.4 v1(58,61.5) ; v1(65.7,77) 66.5,77.8 66.5,83.9 v1(68.1,85.5)
  Bottom Layer w0.1: v1(52.9,54.1) 57.6,49.4 v1(60.5,49.4)
  Bottom Layer w0.25: v1(58,61.5) 58,67.5 60.5,70 v1(62.3,70)
PWM_DATA: J10.39 U6.B9 | length 58.3
  Top Layer w0.1: U6.B9@77.9,54.2 78.3,53.8 89.5,53.8 v1(90.3,54.6)
  Bottom Layer w0.1: v1(90.3,54.6) 90.1,54.4 90.1,44.3 98.2,36.2 110.6,36.2 115.9,30.9 115.9,28.86 J10.39@117.06,27.7
SCAN_TDO: U5.3 U6.F10 | length 44.4
  Top Layer w0.25: U5.3@35.75,54.7 v1@35.75,56.7
  MidLayer1 w0.1: v1@35.725,56.675 41.1,51.3 65.6,51.3 68.1,53.8 74.3,53.8 U6.F10@74.7,53.4
  other v1: 35.7,56.7
SYSCLK_O: R30.1 TP12.1 | length 1.9
  Bottom Layer w0.25: R30.1@81.018,43.162 TP12.1@81.018,45.1
USB_SHLD: C12.2 D9.1 D10.2 D11.2 J5.5 J5.6 J5.7 J5.8 J5.9 R37.2 U7.1 | length 56.1
  Top Layer w0.1: R37.2@84.65,122.45 R37.2@84.7,122.5 ; J5.5@96.25,119.15 J5.5@96.5,118.9
  Top Layer w0.25: C12.2@82.2,122.45 R37.2@84.65,122.45 ; R37.2@84.7,122.5 85.5,123.3 D11.2@88.2,123.3 89.55,124.65 J5.7@93.65,124.65 ; D9.1@89.1,117.3 90.95,119.15 J5.9@93.65,119.15 ; U7.1@91.35,110.75 96.5,115.9 J5.5@96.5,118.9 ; J5.5@96.25,119.15 J5.9@93.65,119.15 ; D10.2@107.1,117.3 105.25,119.15 J5.8@102.55,119.15 J5.6@102.55,124.65 J5.7@93.65,124.65 ; J5.9@93.65,119.15 J5.7@93.65,124.65
USB_VDDA12_DRV: C48.1 C49.1 FB2.1 U6.M2 | length 43.9
  Top Layer w0.1: v1(69.5,67.9) 70.3,67.1 70.3,60.3 69.9,59.9 U6.M2@69.9,59.8
  Top Layer w0.25: v1(82.1,65.4) 85.2,68.5 FB2.1@88.29,68.5
  Bottom Layer w0.25: v1(69.5,67.9) 71.4,66 81.5,66 v1(82.1,65.4) ; FB2.1@88.29,68.5 90.223,70.433 C48.1@99.121,70.433 C49.1@101.661,70.433
USB_VDDA12_PLL: C45.1 C46.1 C47.1 R26.2 U6.L1 | length 45.4
  Top Layer w0.1: v1(69.5,69.1) 70.7,67.9 U6.L1@70.7,60.6
  Top Layer w0.25: v1(82.1,66.6) v1(90.8,75.3)
  Bottom Layer w0.1: R26.2@90.5,72.5 R26.2@90.8,72.8 ; C46.1@92.33,75.3 C46.1@92.647,74.983 ; C45.1@92.647,77.147 C45.1@92.647,77.523
  Bottom Layer w0.25: v1(69.5,69.1) 72,66.6 v1(82.1,66.6) ; R26.2@90.8,72.8 90.8,74.29 ; C46.1@92.33,75.3 v1(90.8,75.3) ; C47.1@92.647,72.443 90.8,74.29 ; C45.1@92.647,77.147 v1(90.8,75.3) ; 90.8,74.29 v1(90.8,75.3)
VBUS: D10.1 J5.1 R33.2 | length 85.5
  Top Layer w0.1: 106.2,113.8 D10.1@107.1,114.7
  Top Layer w0.25: R33.2@67.8,65 68.3,65.5 68.3,76.8 v1(68.1,77) ; J5.1@99.7,118.9 102.4,116.2 v1(102.4,113.8) 106.2,113.8
  MidLayer1 w0.25: v1(68.1,77) 69.7,78.6 69.7,99.8 v1(69.9,100)
  Bottom Layer w0.25: v1(69.9,100) 83.5,113.6 102.2,113.6 v1(102.4,113.8)
VDDI: C37.1 C38.1 C39.1 C40.1 FB1.1 U6.C6 U6.C12 U6.H3 U6.L7 U6.L12 | length 56.8
  Top Layer w0.1: U6.L12@70.7,51.8 71.1,52.2 71.1,53.6 71.3,53.8 74.3,53.8 ; U6.L7@70.7,55.8 71.1,55.4 72.7,55.4 ; U6.H3@73.1,59 72.7,58.6 72.7,55.4 ; U6.C12@77.1,51.8 76.7,52.2 76.1,52.2 75.9,52.4 75.9,54 ; U6.C6@77.1,56.6 76.7,56.2 76.1,56.2 75.9,56 75.9,54 ; 72.7,55.4 74.3,53.8 ; 74.3,53.8 75.7,53.8 75.9,54
  Top Layer w0.25: v1(81.5,60.9) 85.4,64.8 FB1.1@88.29,64.8
  MidLayer1 w0.1: U6.C6@77.1,56.6 76.7,57 76.7,58.4 76.9,58.6 79.2,58.6 v1(81.5,60.9)
  Bottom Layer w0.25: FB1.1@88.29,64.8 89.478,65.988 C40.1@99.121,65.988 C39.1@101.661,65.988 C38.1@104.201,65.988 C37.1@106.741,65.988
VIN: C4.2 JP1.2 R1.2 TP7.1 U1.8 U2.5 | length 44.2
  Top Layer w0.1: U1.8@42.994,106.787 U1.8@43,106.793 ; R1.2@43,91.6 R1.2@43.106,91.706 ; C4.2@45.25,91.6 C4.2@45.45,91.4
  Top Layer w0.25: TP7.1@27.897,105.213 30.44,102.67 ; JP1.2@30.44,101.6 30.44,102.67 ; v1(41,92) 42.6,92 R1.2@43,91.6 C4.2@45.25,91.6 ; U1.8@43,106.793 43,108.3 42.5,108.8 38.8,108.8 37.2,107.2 37.2,104.6 36.4,103.8 31.57,103.8 30.44,102.67 ; R1.2@43.106,91.706 U2.5@43.106,93.493
  MidLayer1 w0.25: JP1.2@30.44,101.6 40.04,92 v1(41,92)
VIN_BRD: C1.1 C2.2 JP1.1 PJ1.1 TP5.1 | length 17.5
  Top Layer w0.25: PJ1.1@27.8,85.5 29.536,87.236 C1.1@29.536,90.354 C2.2@29.536,93.529 29.536,96.264 TP5.1@27.9,97.9 JP1.1@27.9,101.6
VPP: C41.1 C42.1 C43.1 C44.1 Q5.2 Q5.4 Q6.2 Q6.4 U6.A9 U6.C9 | length 63.6
  Top Layer w0.1: v1(73.7,69.8) 73.7,65.9 77.5,62.1 77.5,54.834 77.5,54.6 U6.C9@77.1,54.2 ; Q5.4@76.4,91.346 Q5.4@76.421,91.367
  Top Layer w0.25: Q6.4@69.867,105.019 71.5,103.386 71.5,99.491 C44.1@69.932,97.923 C43.1@69.932,95.383 C42.1@69.932,92.843 70.991,92.843 72.467,91.367 ; C41.1@69.932,90.303 71.403,90.303 72.467,91.367 ; v1(76.4,88.8) Q5.4@76.4,91.346 ; Q5.4@76.421,91.367 72.467,91.367
  MidLayer1 w0.25: v1(73.7,69.8) 73.7,86.1 v1(76.4,88.8)
VSUP1: C5.1 C6.1 C27.2 C29.1 C30.1 C31.1 C32.1 FB1.2 J3.2 J4.2 J7.2 J8.2 L1.2 Q5.3 R3.2 R26.1 U2.1 U6.D11 U6.E10 | length 40.2
  Top Layer w0.25: R3.2@43.032,102.094 44.288,103.35 C5.1@45.2,103.35 ; U2.1@43.106,95.493 43.106,96.306 v1(44.3,97.5) ; v1(46.5,106.5) 45.2,105.2 C5.1@45.2,103.35 ; C6.1@47.2,103.35 C5.1@45.2,103.35 ; L1.2@57.8,103.525 v1(57.8,108)
  Bottom Layer w0.1: C27.2@74.25,55.9 74.25,54.85 75.5,53.6 U6.E10@75.5,53.4 ; R26.1@88.4,72.5 R26.1@88.9,72.5 ; C29.1@95.91,62.511 C29.1@95.968,62.453
  Bottom Layer w0.25: 86.8,64 86.8,70.9 R26.1@88.4,72.5 ; 86.801,64 C32.1@88.348,62.453 C31.1@90.888,62.453 C30.1@93.428,62.453 C29.1@95.968,62.453 ; C29.1@95.91,62.511 FB1.2@95.91,64.8
VSUP1_GOOD: Q1.2 Q1.4 U1.5 U2.4 | length 23.3
  Top Layer w0.1: Q1.4@34.982,89.406 Q1.4@34.982,89.682 ; U1.5@39.184,106.787 U1.5@39.3,106.671 ; 39.3,94 39.307,93.993 ; U1.5@39.3,106.787 U1.5@39.3,106.671 ; U1.5@39.4,106.571 U1.5@39.3,106.671
  Top Layer w0.25: Q1.4@34.982,89.682 39.3,94 U1.5@39.3,106.671 ; 39.307,93.993 U2.4@43.106,93.993
VSUP3: C3.1 C33.1 C34.1 C35.1 C36.1 FB2.2 FB4.1 J2.2 J3.1 J4.1 J7.1 J8.1 J10.1 JP2.2 JP3.1 JP4.1 JP5.1 Q6.3 R6.2 R7.2 R8.2 R9.2 R10.2 R11.2 R16.2 R17.2 R19.2 R23.2 R24.2 R25.2 R32.1 R43.2 R49.2 R50.2 R51.2 R52.2 R114.2 R115.2 R116.2 TP8.1 U2.9 U3.4 U4.5 U5.5 U6.B2 U6.C13 U6.D5 U6.D7 U6.E5 U6.E8 U6.F5 U6.G5 U6.G12 U6.H5 U6.K11 U6.L4 U6.L10 U6.M5 U6.M7 U6.M9 U6.P1 U7.4 U9.1 U9.3 U9.9 U9.14 U9.27 U9.43 U9.49 U10.12 U10.37 U11.12 U11.37 | length 131.6
  Top Layer w0.1: TP8.1@28.1,113.3 TP8.1@28.6,112.8 ; R17.2@30.7,69.8 R17.2@31,69.8 ; v1@35.8,51.3 v1(35.9,51.2) ; R23.2@45.4,32.006 R23.2@45.476,32.082 ; R24.2@54.366,32.082 R24.2@54.4,32.048 ; R25.2@63.383,32.082 R25.2@63.4,32.065 ; U7.4@93.45,110.95 U7.4@93.45,111.05 ; R43.2@97.1,85.9 R43.2@97.5,85.5
  Top Layer w0.25: TP8.1@28.1,113.3 R6.2@28.1,117.4 ; R17.2@31,69.8 v1(32.3,68.5) 32.825,69.025 U3.4@32.825,69.85 ; v1(35.9,51.2) 36.4,51.7 U5.5@36.4,53.1 ; R116.2@42.555,32.082 45.4,29.237 ; JP3.1@45.4,27.7 45.4,29.237 ; R23.2@45.4,32.006 45.4,29.237 ; U2.9@45.931,94.993 47.793,94.993 v1(48.5,95.7) ; R19.2@49.8,54.2 49.8,55.1 50.3,55.6 U4.5@50.3,56.575 ; R115.2@51.445,32.082 54.4,29.127 ; JP4.1@54.4,27.7 54.4,29.127 ; R24.2@54.4,32.048 54.4,29.127 ; R114.2@60.335,32.082 63.4,29.017 ; JP5.1@63.4,27.7 63.4,29.017 ; R25.2@63.4,32.065 63.4,29.017 ; Q6.3@75.867,107.319 77.181,107.319 v1(78.5,106) R32.1@79.9,104.6 ; U7.4@93.45,111.05 v1(95,112.6) ; R43.2@97.1,85.9 97.1,88.2 97.666,88.766 U11.12@102.244,88.766 104.766,88.766 v1(105.5,89.5) ; U10.12@102.244,103.066 104.766,103.066 v1(105.5,103.8) ; U11.37@121.544,88.766 124.066,88.766 v1(124.8,89.5) ; U10.37@121.544,103.066 124.066,103.066 v1(124.8,103.8)
  Bottom Layer w0.25: R16.2@28.3,30.7 R7.2@28.3,33.2 27.74,33.76 J2.2@27.74,36.196 29.044,37.5 ; R8.2@32.8,36.8 32.1,37.5 29.044,37.5 ; R9.2@32.8,40.1 29.7,40.1 29.044,39.444 29.044,37.5 ; R10.2@34.4,51.3 v1@35.8,51.3 ; R11.2@40.2,29.9 43.2,29.9 JP3.1@45.4,27.7 ; C3.1@47.2,98.35 47.2,97 v1(48.5,95.7) ; v1(83,70.5) 84.9,68.6 R49.2@84.9,66.2 ; R50.2@93.2,57.7 93.8,57.7 v1(96.5,55) 102,55 R52.2@102.5,54.5 106,51 R51.2@106,50.2 ; v1(96.8,74.878) C36.1@99.121,74.878 C35.1@101.661,74.878 C34.1@104.201,74.878 C33.1@106.741,74.878
VSUP3_BRD: C7.1 C8.1 C9.1 C28.2 JP2.1 R5.2 TP6.1 U1.1 U1.2 | length 35.8
  Top Layer w0.1: JP2.1@27.9,108.9 JP2.1@27.9,109 ; C7.1@36.85,116.85 C7.1@37.2,116.85 ; U1.2@41.724,111.587 U1.1@42.994,111.587
  Top Layer w0.25: JP2.1@27.9,108.9 31.46,105.34 C28.2@34.005,105.34 ; JP2.1@27.9,109 29.7,110.8 30.8,110.8 TP6.1@32.8,112.8 ; R5.2@32.2,117.4 32.2,113.4 TP6.1@32.8,112.8 ; C7.1@36.85,116.85 TP6.1@32.8,112.8 ; C7.1@37.2,116.85 C8.1@39.2,116.85 C9.1@41.2,116.85 41.724,116.326 U1.2@41.724,111.587
pads on no net: J1.5 J1.6 J1.7 J1.8 J1.9 U9.40 U10.1 U10.2 U10.3 U10.4 U10.5 U10.6 U10.10 U10.11 U10.14 U10.15 U10.20 U10.21 U10.22 U10.23 U10.24 U10.25 U10.26 U10.27 U10.28 U10.33 U10.34 U10.35 U10.38 U10.39 U10.40 U10.45 U10.46 U10.47 U10.48 U11.1 U11.2 U11.3 U11.4 U11.5 U11.6 U11.10 U11.11 U11.14 U11.15 U11.20 U11.21 U11.22 U11.23 U11.24 U11.25 U11.26 U11.27 U11.28 U11.33 U11.34 U11.35 U11.38 U11.39 U11.40 U11.45 U11.46 U11.47 U11.48
copper on no net:
  other v2: 95.9,121.9 100.3,121.9

## Polygon pours and split planes (outlines as drawn)
VSUP1 on VSUP1_PLANE (split plane): 141.39,26.31 90.81,26.31 90.81,84.29 141.39,84.29
VSUP1 on VSUP1_PLANE (split plane): 141.39,85.31 90.3,85.31 90.2,85.301 90.105,85.272 90.016,85.224 89.939,85.161 89.876,85.084 89.828,84.995 89.799,84.9 89.79,84.8 89.79,26.31 26.01,26.31 26.01,126.19 141.39,126.19
GND on GND_PLANE (split plane): 141.39,26.31 90.81,26.31 90.81,84.29 141.39,84.29
GND on GND_PLANE (split plane): 141.39,85.31 90.3,85.31 90.2,85.301 90.105,85.272 90.016,85.224 89.939,85.161 89.876,85.084 89.828,84.995 89.799,84.9 89.79,84.8 89.79,26.31 26.01,26.31 26.01,126.19 141.39,126.19
VSUP3 on VSUP3_PLANE (split plane): 141.39,26.31 90.81,26.31 90.81,84.29 141.39,84.29
VSUP3 on VSUP3_PLANE (split plane): 141.39,85.31 90.3,85.31 90.2,85.301 90.105,85.272 90.016,85.224 89.939,85.161 89.876,85.084 89.828,84.995 89.799,84.9 89.79,84.8 89.79,26.31 26.01,26.31 26.01,126.19 141.39,126.19

## Silkscreen, mask and mechanical layers (free items; w line width, h text height)
Top Overlay:
  text "+" at 28.5,87.3 h1.52 r90
  text "5V IN" at 31.2,80.7 h1.52 r90
  text "GND" at 28.5,77.1 h1.52 r90

## Text inside footprints (layer, text, board x,y; h text height)
J1: Top Overlay "6" at 54.745,121.225 h1.5; Top Overlay "9" at 63.055,121.225 h1.5; Top Overlay "5" at 66.9,114.2 h1.5; Top Overlay "1" at 51.3,114.2 h1.5
J2: Top Overlay "20" at 28.248,60.834 h1.27 r90; Top Overlay "19" at 30.788,60.834 h1.27 r90; Top Overlay "1" at 30.788,33.656 h1.27 r90; Top Overlay "2" at 28.248,33.529 h1.27 r90
J3: Top Overlay "10" at 135.3,105.7 h1.27 r90; Top Overlay "9" at 137.9,105.7 h1.27 r90; Top Overlay "1" at 138,91.6 h1.27 r90; Top Overlay "2" at 135.368,91.26 h1.27 r90
J4: Top Overlay "10" at 135.4,85.7 h1.27 r90; Top Overlay "9" at 137.9,85.7 h1.27 r90; Top Overlay "1" at 137.9,71.6 h1.27 r90; Top Overlay "2" at 135.368,71.26 h1.27 r90
J7: Top Overlay "10" at 139.2,45.6 h1.27; Top Overlay "9" at 139.3,43 h1.27; Top Overlay "1" at 125,43.1 h1.27; Top Overlay "2" at 124.76,45.632 h1.27
J8: Top Overlay "10" at 139.2,29.8 h1.27; Top Overlay "9" at 139.2,27.2 h1.27; Top Overlay "1" at 125.1,27.3 h1.27; Top Overlay "2" at 124.76,29.732 h1.27
J9: Top Overlay "10" at 135.363,66.193 h1.27 r90; Top Overlay "9" at 137.903,66.193 h1.27 r90; Top Overlay "1" at 137.903,51.842 h1.27 r90; Top Overlay "2" at 135.363,51.715 h1.27 r90
J10: Top Overlay "1" at 66.26,27.192 h1.27; Top Overlay "2" at 66.26,29.732 h1.27; Top Overlay "40" at 119.092,29.732 h1.27; Top Overlay "39" at 119.092,27.192 h1.27